# Altium PCB PID.PcbDoc
Units mil, origin at the board's own origin, x right, y up, seen from the top; angles counter-clockwise.
Board outline 6000 x 4000 mil, 2 copper layers (Top Layer, Bottom Layer); 45 components, 42 nets, 163 pads, 0 vias.
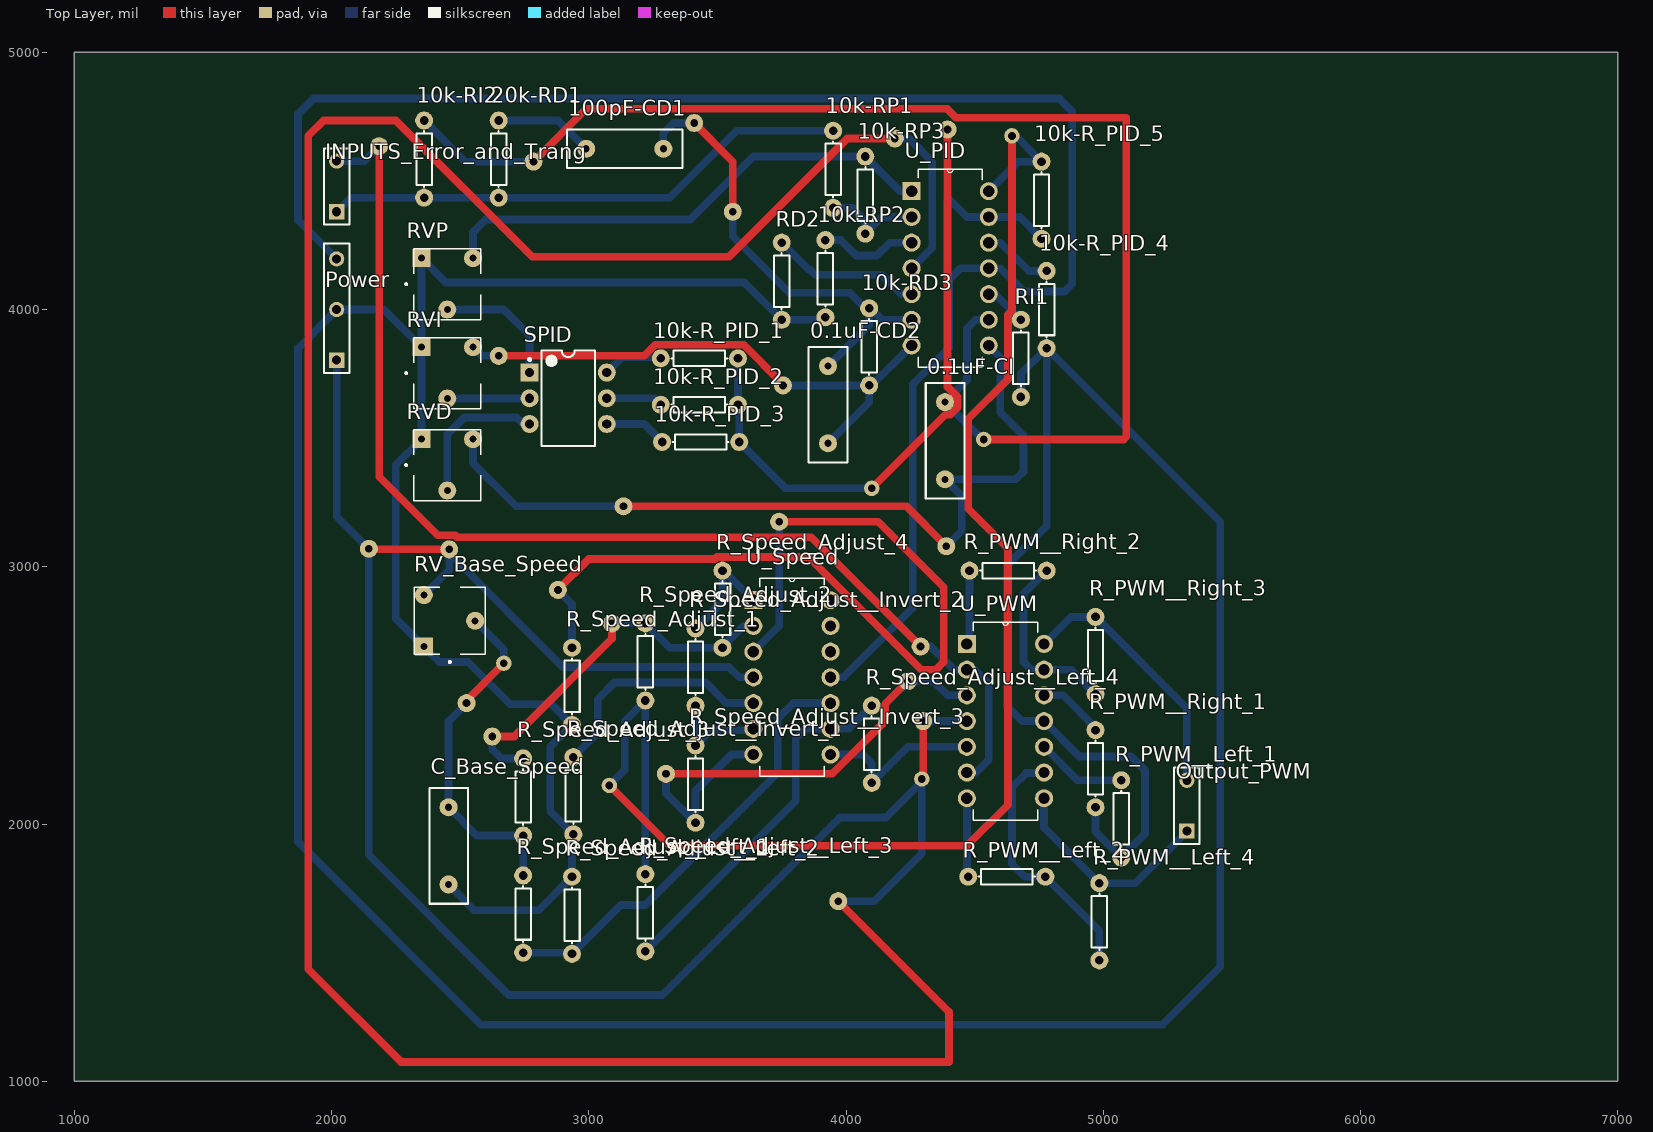
[diagram p0: Top Layer view]
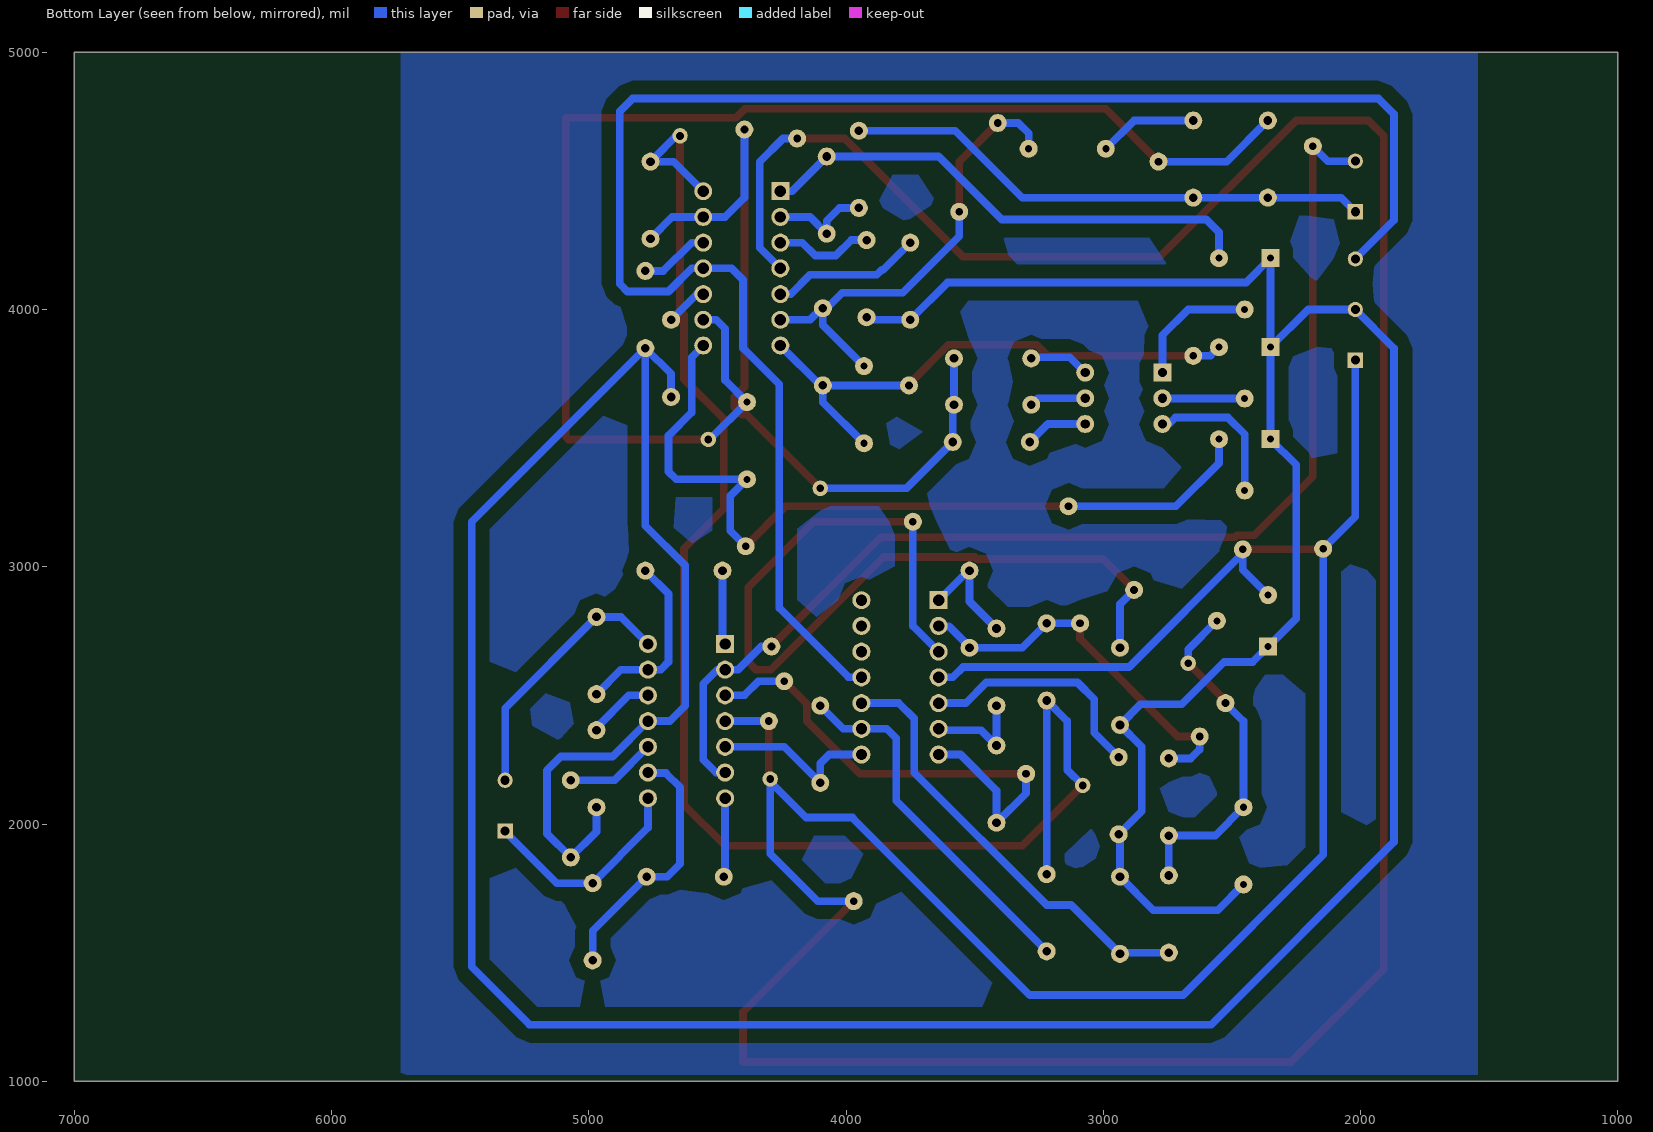
[diagram p1: Bottom Layer view, seen from below]

## Layer stack, top to bottom
Top Solder: solder mask 0.4, Solder Resist, Dk 3.5
Top Layer: signal copper 1.4
Dielectric 1: dielectric 12.6, FR-4, Dk 4.8
Bottom Layer: signal copper 1.4
Bottom Solder: solder mask 0.4, Solder Resist, Dk 3.5

## Board outline
1000,1000 7000,1000 7000,5000 1000,5000

## Design rules (kind name [scope] priority, off if disabled: settings)
Clearance [All] p1: gap=0 ignorepadtopadclearanceinfootprint=FALSE
PolygonConnect [All] p1: connectstyle=Relief reliefconductorwidth=10 reliefentries=4 polygonreliefangle="90 Angle" airgapwidth=10
RoomDefinition PID [InComponentClass('PID')] p1: confinementstyle=ConfineIn formatcopy=TRUE lockcomponents=FALSE outline 0,0 2000,0 2000,1000 0,1000
RoomDefinition "AT long bus (13.3 x 4.2 inches)" [InComponentClass('AT long bus (13.3 x 4.2 inches)')] p2: confinementstyle=ConfineIn formatcopy=TRUE lockcomponents=FALSE outline 0,0 2000,0 2000,1000 0,1000
RoutingVias [All] p1: holewidth=28 width=50 viastyle="Through Hole" minholewidth=28 minwidth=50 maxholewidth=28 maxwidth=50
SolderMaskExpansion [All] p1: expansion=4
UnRoutedNet [All] p1: checkbadconnections=TRUE
Width [All] p1: maxlimit=50 minlimit=10 preferedwidth=30
29 further rules are at their usual default settings.

## Classes and differential pairs
component class "AT long bus (13.3 x 4.2 inches)": P?

## Components (designator, comment, footprint, x,y, rotation, side; value= is the part's Value field where it differs from the comment)
0.1uF-CD2 "Cap" RAD-0.3 3930,3630 r270 top value=100nF
0.1uF-CI "Cap" RAD-0.3 4385,3490 r270 top value=100pF
10k-R_PID_1 "Res1" AXIAL-0.3 3430,3810 r0 top value=10k
10k-R_PID_2 "Res1" AXIAL-0.3 3430,3630 r0 top value=10k
10k-R_PID_3 "Res1" AXIAL-0.3 3435,3485 r0 top value=10k
10k-R_PID_4 "Res1" AXIAL-0.3 4780,4000 r90 top value=10k
10k-R_PID_5 "Res1" AXIAL-0.3 4760,4425 r90 top value=1K
10k-RD3 "Res1" AXIAL-0.3 4090,3855 r270 top value=10k
10k-RI2 "Res1" AXIAL-0.3 2360,4585 r90 top value=1K
10k-RP1 "" AXIAL-0.3 3950,4545 r270 top value=1K
10k-RP2 "" AXIAL-0.3 3920,4120 r90 top value=1K
10k-RP3 "" AXIAL-0.3 4075,4445 r90 top value=1K
20k-RD1 "Res1" AXIAL-0.3 2650,4585 r90 top value=10k
100pF-CD1 "Cap" RAD-0.3 3140,4625 r0 top value=100pF
C_Base_Speed "Cap" RAD-0.3 2455,1915 r90 top value=100pF
INPUTS_Error_and_Trang "Header 2" HDR1X2 2020,4380 r90 top
Output_PWM "Header 2" HDR1X2 5325,1973.15 r90 top
Power "Header 3" HDR1X3 2020,3803.15 r90 top
R_PWM__Left_1 "Res1" AXIAL-0.3 5070,2020 r90 top value=10k
R_PWM__Left_2 "Res1" AXIAL-0.3 4625,1795 r0 top value=10k
R_PWM__Left_4 "Res1" AXIAL-0.3 4985,1620 r90 top value=1K
R_PWM__Right_1 "Res1" AXIAL-0.3 4970,2215 r90 top value=10k
R_PWM__Right_2 "Res1" AXIAL-0.3 4630,2985 r0 top value=10k
R_PWM__Right_3 "Res1" AXIAL-0.3 4970,2655 r90 top value=1K
R_Speed_Adjust_1 "Res1" AXIAL-0.3 2935,2535 r90 top value=10k
R_Speed_Adjust_2 "Res1" AXIAL-0.3 3220,2630 r90 top value=1K
R_Speed_Adjust_3 "Res1" AXIAL-0.3 2745,2105 r90 top value=10k
R_Speed_Adjust_4 "Res1" AXIAL-0.3 3520,2835 r90 top value=1K
R_Speed_Adjust__Invert_1 "Res1" AXIAL-0.3 2940,2110 r90 top value=1K
R_Speed_Adjust__Invert_2 "Res1" AXIAL-0.3 3415,2610 r270 top value=1K
R_Speed_Adjust__Invert_3 "Res1" AXIAL-0.3 3415,2155 r270 top value=1K
R_Speed_Adjust__Left_1 "Res1" AXIAL-0.3 2745,1650 r270 top value=1K
R_Speed_Adjust__Left_2 "Res1" AXIAL-0.3 2935,1645 r270 top value=1K
R_Speed_Adjust__Left_3 "Res1" AXIAL-0.3 3220,1655 r270 top value=1K
R_Speed_Adjust__Left_4 "Res1" AXIAL-0.3 4100,2310 r270 top value=1K
RD2 "Res1" AXIAL-0.3 3750,4110 r90 top value=1K
RI1 "Res1" AXIAL-0.3 4680,3810 r90 top value=1K
RV_Base_Speed "3362R-1-222" *TRIM_3362R-1-222 2460,2790 r90 top
RVD "3362R-1-222" *TRIM_3362R-1-222 2450,3395 r0 top
RVI "3362R-1-222" *TRIM_3362R-1-222 2450,3752.44 r0 top
RVP "3362R-1-222" *TRIM_3362R-1-222 2450,4098.43 r0 top
SPID "SW DIP-3" DIP-6 2920,3655 r0 top
U_PID "LM324N" *DIP254P762X508-14 4555,3860 r0 top
U_PWM "LM324N" *DIP254P762X508-14 4770,2100 r0 top
U_Speed "LM324N" *DIP254P762X508-14 3940,2270 r0 top

## Footprints (in the part's own frame and the unit in brackets; to place one, negate y for a bottom-side part, rotate by r counter-clockwise, add the part's x,y. Pads: shape width x height; smd on the part's side, far side on the other; paste and mask are expansions set on the pad)
*DIP254P762X508-14 [mil]
  rect 70x70 hole 44: 1(-300,600)
  round 70 hole 44: 2(-300,500) 3(-300,400) 4(-300,300) 5(-300,200) 6(-300,100) 7(-300,0) 8(0,0) 9(0,100) 10(0,200) 11(0,300) 12(0,400) 13(0,500) 14(0,600)
  silkscreen extent -275,-85 -25,685
*TRIM_3362R-1-222 [mil]
  rect 70x70 hole 27.17: 1(-100,100.98)
  round 70 hole 27.17: 2(0,-98.43) 3(100,100.98)
  silkscreen extent -164,-138 130,138
AXIAL-0.3 [mil] "Axial Device, Thru-Hole; 2 Leads; 0.3 in Pin Spacing"
  round 70 hole 33.46: 1(-150,0) 2(150,0)
  silkscreen extent -109,-30 109,30
DIP-6 [mil] "DIP; 6 Leads; Row Spacing 7.62 mm; Pitch 2.54 mm"
  rect 70x70 hole 35.43: 1(-150,100)
  round 70 hole 35.43: 2(-150,0) 3(-150,-100) 4(150,-100) 5(150,0) 6(150,100)
  silkscreen extent -155,-185 104,185, body extent -140,-185 140,185, height 215
HDR1X2 [mm] "Connector; Header; 2 Position"
  rect 1.5x1.5 hole 0.9: 1(0,0)
  round 1.5 hole 0.9: 2(5,0)
  silkscreen extent -1.27,-1.27 6.25,1.27
HDR1X3 [mm] "Connector; Header; 3 Position"
  rect 1.5x1.5 hole 0.9: 1(0,0)
  round 1.5 hole 0.9: 2(5,0) 3(10,0)
  silkscreen extent -1.27,-1.27 11.5,1.27
RAD-0.3 [mil] "Radial Cap, Thru-Hole; 2 Leads; 0.3 in Pin Spacing"
  round 70 hole 27.56: 1(-150,0) 2(150,0)
  silkscreen extent -225,-75 225,75

## Part data
0.1uF-CD2 0.1uF-CI 100pF-CD1 C_Base_Speed: "Capacitor", LatestRevisionDate=17-Jul-2002, LatestRevisionNote="Re-released for DXP Platform.", PackageDescription="Radial Cap, Thru-Hole; 2 Leads; 0.3 in Pin Spacing", PackageReference=RAD-0.3, Published=8-Jun-2000, Publisher="Altium Limited"
10k-R_PID_1 10k-R_PID_2 10k-R_PID_3 10k-R_PID_4 10k-R_PID_5 10k-RD3 10k-RI2 20k-RD1 R_PWM__Left_1 R_PWM__Left_2 R_PWM__Left_4 R_PWM__Right_1 R_PWM__Right_2 R_PWM__Right_3 R_Speed_Adjust_1 R_Speed_Adjust_2 R_Speed_Adjust_3 R_Speed_Adjust_4 R_Speed_Adjust__Invert_1 R_Speed_Adjust__Invert_2 R_Speed_Adjust__Invert_3 R_Speed_Adjust__Left_1 R_Speed_Adjust__Left_2 R_Speed_Adjust__Left_3 R_Speed_Adjust__Left_4 RD2 RI1: "Resistor", LatestRevisionDate=17-Jul-2002, LatestRevisionNote="Re-released for DXP Platform.", PackageDescription="Axial Device, Thru-Hole; 2 Leads; 0.3 in Pin Spacing", PackageReference=AXIAL-0.3, Published=8-Jun-2000, Publisher="Altium Limited"
10k-RP1 10k-RP2 10k-RP3: library part Res1, "Resistor", LatestRevisionDate=17-Jul-2002, LatestRevisionNote="Re-released for DXP Platform.", PackageDescription="Axial Device, Thru-Hole; 2 Leads; 0.3 in Pin Spacing", PackageReference=AXIAL-0.3, Published=8-Jun-2000, Publisher="Altium Limited"
INPUTS_Error_and_Trang Output_PWM: "Header, 2-Pin", LatestRevisionDate=17-Jul-2002, LatestRevisionNote="Re-released for DXP Platform.", Publisher="Altium Limited"
Power: "Header, 3-Pin", LatestRevisionDate=17-Jul-2002, LatestRevisionNote="Re-released for DXP Platform.", Publisher="Altium Limited"
RV_Base_Speed RVD RVI RVP: "Trimpot 2.2k Ohm 1/4 Sq Cer St", Package="2220 Bourns", Availability=Unavailable, MF=Bourns, MP=3362R-1-222, Price=None, SnapEDA_Link=https://www.snapeda.com/parts/3362R-1-222/Bourns/view-part/?ref=snap
SPID: "DIP Switch, 3 Position, SPST", Code_JEDEC=MO-001-AM, LatestRevisionDate=17-Jul-2002, LatestRevisionNote="Re-released for DXP Platform.", PackageReference=DIP-6, Published=24-Mar-1999, Publisher="Altium Limited"
U_PID U_PWM U_Speed: "OP Amp Quad GP ?15V/30V 14-Pin PDIP Tube", Package="DIP-14 STMicroelectronics", Availability=Unavailable, MF="ON Semiconductor", MP=LM324N, Price=None, SnapEDA_Link=https://www.snapeda.com/parts/LM324N/ON%20Semiconductor/view-part/?ref=snap

## Free pads (board coordinates)
  round 70 hole 30: 6(2145,3070) 7(2457.44,3067.56) 8(3560,4380) 9(3410,4725) 11(2525,2470) 12(2625,2340) 13(3090,2780) 14(4300,2400) 18(4395,4700) 20(4390,3080) 21(3135,3235) 22(4240,2555) 23(3300,2195) 24(2785,4575) 26(4290,2690) 28(2185,4635) 29(3755,3705) 30(2650,3820) 31(3740,3175) 32(2880,2910) 33(4190,4665) 34(3970,1700)
  round 60 hole 30: 10(2670,2625) 15(4295,2175) 19(4100,3305) 25(4535,3495) 35(3080,2150) 36(4645,4675)

## Nets (pads, with @x,y where several pads share a name; then routed paths per layer and width w, separated by ;. In a path a pad name is that pad's centre, name@x,y a point inside that pad or via, vN(x,y) a via of type N, cw(c..) or ccw(c..) an arc to the next point about the centre after c; other vN are vias at no path point)
Error_Input: 10k-RI2.1 10k-RP1.1 20k-RD1.1 INPUTS_Error_and_Trang.1 | length 2060.5
  Bottom Layer w30: INPUTS_Error_and_Trang.1 2075,4435 10k-RI2.1 20k-RD1.1 3315,4435 3575,4695 10k-RP1.1
Net0.1uF-CD2_1: 0.1uF-CD2.1 10k-RD3.1 100pF-CD1.2 pad.8 pad.9 U_PID.6 | length 1819.6
  Top Layer w30: pad.9 3560,4575 pad.8
  Bottom Layer w30: 100pF-CD1.2 3290,4685 3330,4725 pad.9 ; pad.8 3560,4285 3780,4065 4015,4065 4075,4005 10k-RD3.1 ; 0.1uF-CD2.1 4090,3940 10k-RD3.1 ; U_PID.6 4140,3960 4095,4005 10k-RD3.1
Net0.1uF-CD2_2: 0.1uF-CD2.2 10k-RD3.2 pad.29 pad.30 RVI.3 U_PID.7 | length 2159.8
  Top Layer w30: pad.30 3215.67,3820 3258.23,3862.56 3601.77,3862.56 3755,3709.33 pad.29
  Bottom Layer w30: RVI.3 2583.43,3820 pad.30 ; pad.29 10k-RD3.2 ; 0.1uF-CD2.2 4090,3640 10k-RD3.2 ; U_PID.7 4100,3705 10k-RD3.2
Net0.1uF-CI_1: 0.1uF-CI.1 10k-RI2.2 pad.24 pad.25 U_PID.9 | length 5319.6
  Top Layer w30: pad.24 2990,4780 4392.78,4780 4427.78,4745 5090,4745 5090,3505 5080,3495 pad.25
  Bottom Layer w30: 10k-RI2.2 2520,4575 pad.24 ; pad.25@4530,3495 0.1uF-CI.1 4470,3725 4470,3925 4505,3960 U_PID.9
Net0.1uF-CI_2: 0.1uF-CI.2 pad.20 pad.21 RVD.3 U_PID.8 | length 3252.2
  Top Layer w30: pad.21 4235,3235 pad.20
  Bottom Layer w30: RVD.3 2550,3402.56 2717.56,3235 pad.21 pad.21@3145,3235 ; pad.20 4450,3140 4450,3275 0.1uF-CI.2 4660,3340 4690,3370 4690,3510 4600,3600 4600,3815 U_PID.8
Net10k-R_PID_1_1: 10k-R_PID_1.1 SPID.6 | length 236.9
  Bottom Layer w30: SPID.6 3130,3815 3275,3815 10k-R_PID_1.1
Net10k-R_PID_1_2: 10k-R_PID_1.2 10k-R_PID_2.2 10k-R_PID_3.2 10k-R_PID_5.1 pad.18 pad.19 U_PID.13 | length 3173.1
  Top Layer w30: pad.19 4386.38,3591.38 4405.14,3591.38 4433.62,3619.86 4433.62,3660.14 4395,3698.76 pad.18
  Bottom Layer w30: 10k-R_PID_1.2 10k-R_PID_2.2 3585,3625 10k-R_PID_3.2 3765,3305 pad.19 ; pad.18 4395,4435 4470,4360 U_PID.13 4675,4360 10k-R_PID_5.1
Net10k-R_PID_2_1: 10k-R_PID_2.1 SPID.5 | length 220.4
  Bottom Layer w30: SPID.5 3255,3655 10k-R_PID_2.1
Net10k-R_PID_3_1: 10k-R_PID_3.1 SPID.4 | length 244
  Bottom Layer w30: SPID.4 3215,3555 10k-R_PID_3.1
Net10k-R_PID_4_1: 10k-R_PID_4.1 10k-RP2.1 C_Base_Speed.1 Power.2 R_PWM__Left_1.1 R_PWM__Right_1.1 R_Speed_Adjust_1.1 R_Speed_Adjust__Invert_1.1 R_Speed_Adjust__Left_2.1 RD2.1 RI1.1 RV_Base_Speed.1 RVD.1 RVI.1 RVP.1 U_PWM.11 | length 17331.7
  Bottom Layer w30: C_Base_Speed.1 2555,1665 2805,1665 R_Speed_Adjust__Left_2.1 2935,1955 R_Speed_Adjust__Invert_1.1 2850,2050 2850,2300 R_Speed_Adjust_1.1 2855,2465 2695,2465 2530,2630 2419.02,2630 RV_Base_Speed.1 2250,2799.02 2250,3395.98 RVD.1 RVI.1 ; 10k-RP2.1 3910,3960 RD2.1 3605,4105 2444.41,4105 RVP.1 RVI.1 ; RI1.1 4680,3750 10k-R_PID_4.1 ; R_PWM__Right_1.1 4970,1970 R_PWM__Left_1.1 5162.56,1962.56 5162.56,2208.34 5108.34,2262.56 4907.44,2262.56 U_PWM.11 4685,2400 4625,2460 4625,3005 4780,3160 10k-R_PID_4.1 ; RVI.1 2203.43,4000 Power.2 1870,3850 1870,1930 2580,1220 5230,1220 5455,1445 5455,3175 10k-R_PID_4.1
Net10k-R_PID_4_2: 10k-R_PID_4.2 U_PID.12 | length 270.6
  Bottom Layer w30: U_PID.12 4600,4260 4710,4150 10k-R_PID_4.2
Net10k-R_PID_5_2: 10k-R_PID_5.2 pad.35 pad.36 R_Speed_Adjust_2.1 R_Speed_Adjust__Left_3.1 U_PID.14 | length 5919.4
  Top Layer w30: pad.35 3315,1915 4470,1915 4630,2075 4630,3070 4475,3225 4475,3575 4630,3730 4630,3980.71 4645,3995.71 pad.36
  Bottom Layer w30: pad.35 3140,2210 3140,2400 R_Speed_Adjust_2.1 R_Speed_Adjust__Left_3.1 ; U_PID.14 4670,4575 10k-R_PID_5.2 pad.36@4650,4685
Net10k-RP1_2: 10k-RP1.2 10k-RP3.1 U_PID.2 | length 402.6
  Bottom Layer w30: 10k-RP1.2 4025,4395 4075,4345 10k-RP3.1 4140,4360 U_PID.2
Net10k-RP2_2: 10k-RP2.2 U_PID.3 | length 380.6
  Bottom Layer w30: 10k-RP2.2 3980,4270 4040,4210 4120,4210 4170,4260 U_PID.3
Net10k-RP3_2: 10k-RP3.2 RVP.3 U_PID.1 | length 1983.7
  Bottom Layer w30: RVP.3 2550,4300 2600,4350 3395,4350 3640,4595 10k-RP3.2 4210,4460 U_PID.1
Net20k-RD1_2: 20k-RD1.2 100pF-CD1.1 | length 385.6
  Bottom Layer w30: 20k-RD1.2 2880,4735 100pF-CD1.1
NetC_Base_Speed_2: C_Base_Speed.2 pad.10 pad.11 R_Speed_Adjust_3.1 R_Speed_Adjust__Left_1.1 RV_Base_Speed.2 | length 1365.8
  Top Layer w30: pad.11 2525,2480 pad.10
  Bottom Layer w30: pad.11 2455,2400 C_Base_Speed.2 2565,1955 R_Speed_Adjust_3.1 R_Speed_Adjust__Left_1.1 ; RV_Base_Speed.2 2670,2678.43 pad.10 pad.10@2670,2610
NetINPUTS_Error_and_Trang_2: INPUTS_Error_and_Trang.2 pad.26 pad.28 U_PWM.2 U_PWM.6 | length 4578.2
  Top Layer w30: pad.28 2185,3350 2412.44,3122.56 2480.22,3122.56 2487.78,3115 3865,3115 pad.26
  Bottom Layer w30: INPUTS_Error_and_Trang.2 2126.85,4576.85 pad.28 ; pad.26 4330,2690 4420,2600 U_PWM.2 4500,2600 4555,2545 4555,2250 4505,2200 U_PWM.6
NetOutput_PWM_1: Output_PWM.1 R_PWM__Left_4.2 U_PWM.8 | length 845
  Bottom Layer w30: U_PWM.8 4770,1985 R_PWM__Left_4.2 5125,1770 5325,1970 Output_PWM.1
NetOutput_PWM_2: Output_PWM.2 R_PWM__Right_3.2 U_PWM.14 | length 1025.5
  Bottom Layer w30: U_PWM.14 4875,2805 R_PWM__Right_3.2 5325,2450 Output_PWM.2
NetPower_1: pad.6 pad.7 pad.14 pad.15 pad.33 pad.34 Power.1 RV_Base_Speed.3 U_PID.4 U_PWM.4 U_Speed.4 | length 17715
  Top Layer w30: pad.6 2147.44,3067.56 pad.7 ; pad.34 4400,1270 4400,1075 2270,1075 1910,1435 1910,4675 1970,4735 2250,4735 2780,4205 3545,4205 4005,4665 pad.33 ; pad.15 4300,2180 pad.14
  Bottom Layer w30: Power.1 2020,3195 pad.6 2145,1880 2690,1335 3285,1335 3975,2025 4155,2025 pad.15@4295,2165 ; RV_Base_Speed.3 2457.44,2988.43 pad.7@2457.44,3052.56 ; pad.7 pad.7@2457.44,3052.56 ; U_Speed.4 3585,2570 3545,2610 2900,2610 pad.7@2457.44,3052.56 ; pad.34 4110,1700 4295,1885 pad.15@4295,2165 ; pad.33@4200,4665 4245,4665 4335,4575 4335,4240 U_PID.4 ; pad.15 pad.15@4295,2165 ; pad.14 U_PWM.4
NetPower_3: Power.3 U_PID.11 U_Speed.11 | length 6664
  Bottom Layer w30: Power.3 1870,4346.85 1870,4760 1930,4820 4830,4820 4880,4770 4880,4100 4850,4070 4690,4070 4600,4160 U_PID.11 4445,4160 4400,4115 4400,3850 4260,3710 4260,2840 3990,2570 U_Speed.11
NetR_PWM__Left_1_2: R_PWM__Left_1.2 U_PWM.10 | length 353.8
  Bottom Layer w30: U_PWM.10 4900,2170 R_PWM__Left_1.2
NetR_PWM__Left_2_1: R_PWM__Left_2.1 U_PWM.7 | length 307.1
  Bottom Layer w30: U_PWM.7 4470,1800 R_PWM__Left_2.1
NetR_PWM__Left_2_2: R_PWM__Left_2.2 R_PWM__Left_4.1 U_PWM.9 | length 1009.2
  Bottom Layer w30: U_PWM.9 4768,2198 4700.12,2198 4645,2142.88 4645,1845 4695,1795 R_PWM__Left_2.2 4985,1585 R_PWM__Left_4.1
NetR_PWM__Right_1_2: R_PWM__Right_1.2 U_PWM.12 | length 261.3
  Bottom Layer w30: U_PWM.12 4844.1,2500 4970,2374.1 R_PWM__Right_1.2
NetR_PWM__Right_2_1: R_PWM__Right_2.1 U_PWM.1 | length 289.1
  Bottom Layer w30: U_PWM.1 4480,2710 R_PWM__Right_2.1
NetR_PWM__Right_2_2: R_PWM__Right_2.2 R_PWM__Right_3.1 U_PWM.13 | length 724.1
  Bottom Layer w30: R_PWM__Right_2.2 4690,2895 4690,2630 4720,2600 U_PWM.13 4875,2600 R_PWM__Right_3.1
NetR_Speed_Adjust_1_2: pad.31 pad.32 R_Speed_Adjust_1.2 U_Speed.3 | length 3576.3
  Top Layer w30: pad.32 3000,3030 3490.67,3030 3498.23,3037.56 3854.47,3037.56 4292.02,2600 4350,2600 4380,2630 4380,2920 4125,3175 pad.31
  Bottom Layer w30: pad.32 2935,2855 R_Speed_Adjust_1.2 ; U_Speed.3 3740,2770 pad.31
NetR_Speed_Adjust_2_2: pad.12 pad.13 R_Speed_Adjust_2.2 R_Speed_Adjust_3.2 R_Speed_Adjust_4.1 U_Speed.2 | length 1503.6
  Top Layer w30: pad.12 2710,2340 3090,2720 pad.13
  Bottom Layer w30: pad.12 2625,2290 2660,2255 R_Speed_Adjust_3.2 ; pad.13@3080,2780 pad.13 R_Speed_Adjust_2.2 3315,2685 R_Speed_Adjust_4.1 3520,2688.59 3599.41,2768 3638,2768 U_Speed.2
NetR_Speed_Adjust_4_2: R_Speed_Adjust_4.2 R_Speed_Adjust__Invert_2.1 U_Speed.1 | length 436.1
  Bottom Layer w30: R_Speed_Adjust__Invert_2.1 3520,2865 R_Speed_Adjust_4.2 3525,2985 U_Speed.1
NetR_Speed_Adjust__Invert_1_2: R_Speed_Adjust__Invert_1.2 U_Speed.5 | length 929.4
  Bottom Layer w30: R_Speed_Adjust__Invert_1.2 3035,2355 3035,2485 3100,2550 3455,2550 3535,2470 U_Speed.5
NetR_Speed_Adjust__Invert_2_2: R_Speed_Adjust__Invert_2.2 R_Speed_Adjust__Invert_3.1 U_Speed.6 | length 406.9
  Bottom Layer w30: R_Speed_Adjust__Invert_2.2 R_Speed_Adjust__Invert_3.1 3475,2365 3635,2365 U_Speed.6
NetR_Speed_Adjust__Invert_3_2: pad.22 pad.23 R_Speed_Adjust__Invert_3.2 U_PWM.3 U_Speed.7 | length 2036.8
  Top Layer w30: pad.23 3947.02,2195 4152.56,2400.53 4152.56,2467.56 pad.22
  Bottom Layer w30: pad.23 3300,2120 R_Speed_Adjust__Invert_3.2 3415,2130 3555,2270 U_Speed.7 ; pad.22@4230,2555 pad.22 4340,2555 4395,2500 U_PWM.3
NetR_Speed_Adjust__Left_1_2: R_Speed_Adjust__Left_1.2 R_Speed_Adjust__Left_2.2 U_Speed.10 | length 1723.9
  Bottom Layer w30: R_Speed_Adjust__Left_1.2 2930,1500 R_Speed_Adjust__Left_2.2 3125,1685 3220,1685 3735,2200 3735,2410 3795,2470 U_Speed.10
NetR_Speed_Adjust__Left_3_2: R_Speed_Adjust__Left_3.2 R_Speed_Adjust__Left_4.1 U_Speed.9 | length 1418.2
  Bottom Layer w30: R_Speed_Adjust__Left_3.2 3805,2090 3805,2333.43 3841.57,2370 U_Speed.9 4010,2370 R_Speed_Adjust__Left_4.1
NetR_Speed_Adjust__Left_4_2: R_Speed_Adjust__Left_4.2 U_PWM.5 U_Speed.8 | length 677.5
  Bottom Layer w30: U_Speed.8 4065,2270 4100,2235 R_Speed_Adjust__Left_4.2 4240,2300 U_PWM.5
NetRD2_2: RD2.2 U_PID.5 | length 587.8
  Bottom Layer w30: RD2.2 3855,4155 3860,4155 3880,4135 4140,4135 4215,4060 U_PID.5
NetRI1_2: RI1.2 U_PID.10 | length 166.4
  Bottom Layer w30: U_PID.10 4580,4060 RI1.2
NetRVD_2: RVD.2 SPID.3 | length 575.7
  Bottom Layer w30: RVD.2 2450,3515 2515,3580 2720,3580 2745,3555 SPID.3
NetRVI_2: RVI.2 SPID.2 | length 320.4
  Bottom Layer w30: RVI.2 2769.02,3654.02 SPID.2
NetRVP_2: RVP.2 SPID.1 | length 506.4
  Bottom Layer w30: RVP.2 2670,4000 2770,3900 SPID.1
pads on no net: U_Speed.12 U_Speed.13 U_Speed.14

## Polygon pours and split planes (outlines as drawn)
no net on Bottom Layer "Bottom Layer-No Net 1" (solid, pour order 0): 1545,5000 5730,5000 5730,1005 5710,1025 1545,1025